# Altium PCB Tigershark 3D R2.3 - TR.PcbDoc (part 3 of 4)
Units mil, origin at the board's own origin, x right, y up, seen from the top; angles counter-clockwise.
Board outline 4100 x 4050 mil, 4 copper layers (Top Layer, Groun Plane, Power Plane, Bottom Layer), stack 61.73 mil thick; 367 components, 240 nets, 1160 pads, 805 vias.
Unrouted connection lines stored in the file: 6.
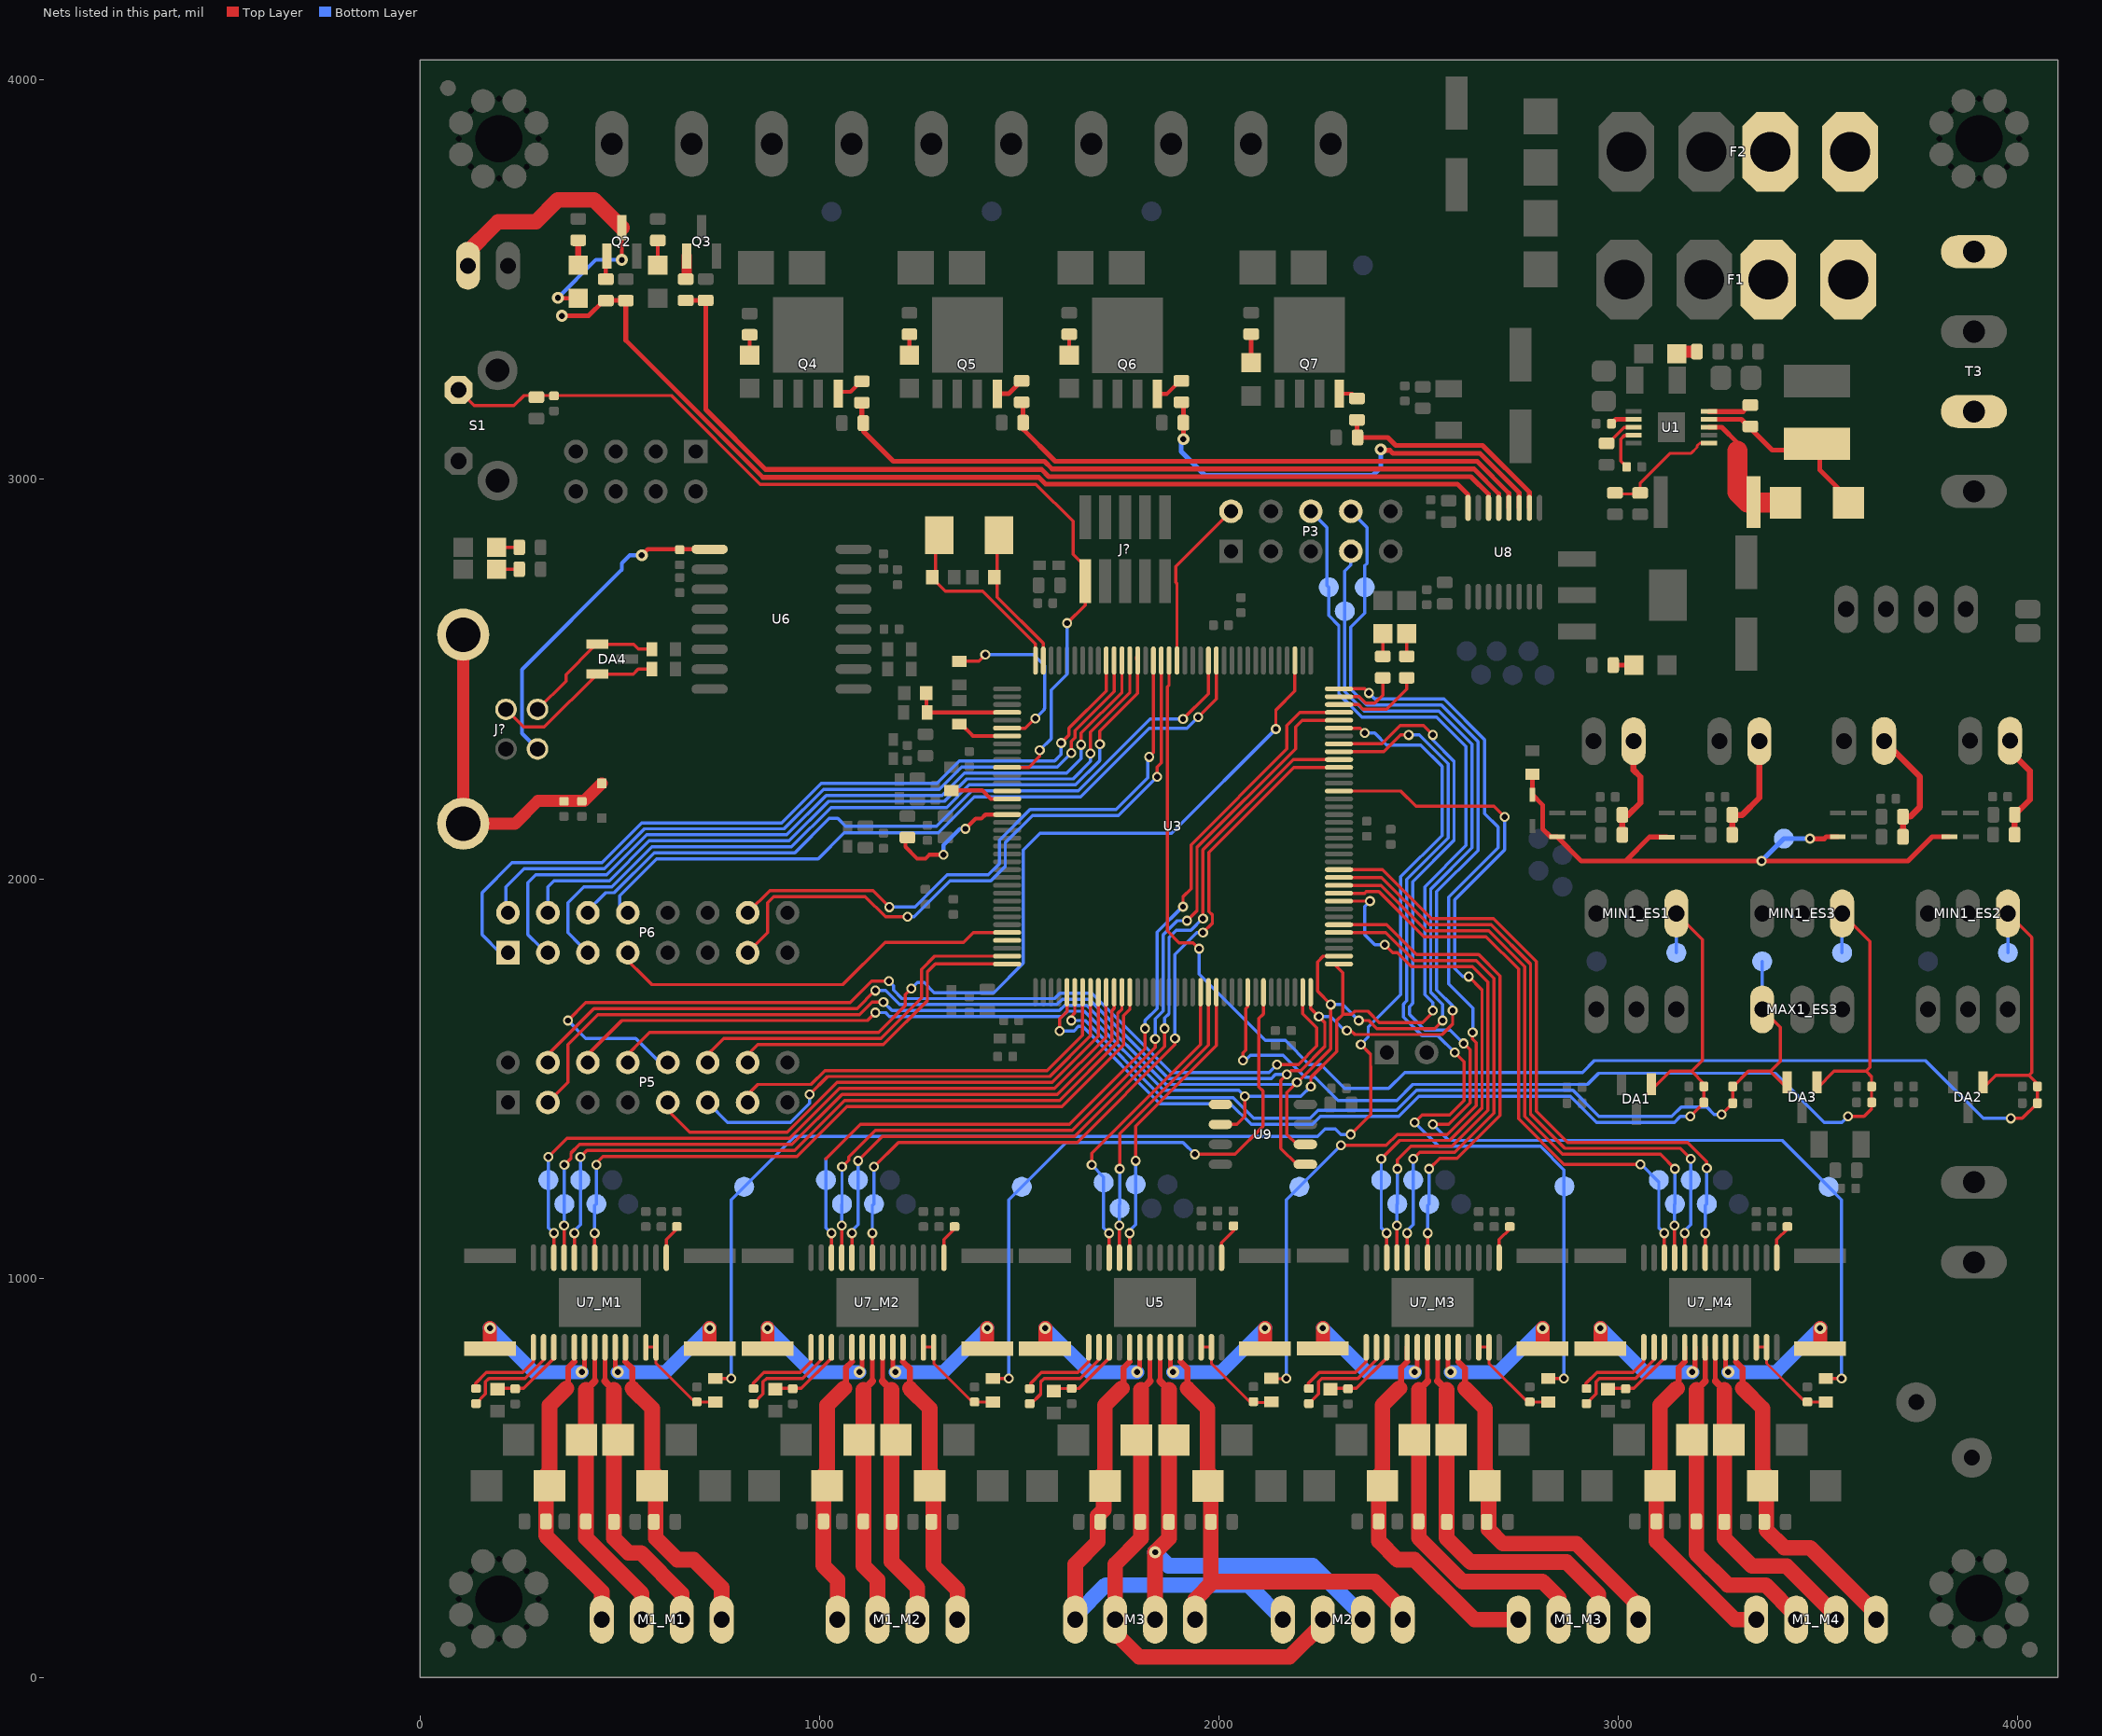
[diagram p5: the nets of this part, all layers, seen from the top]

## Via types
v1: diameter 30, hole 15, Top Layer to Bottom Layer, tented both sides, 465 vias
v2: diameter 25, hole 15, Top Layer to Bottom Layer, tented both sides, 192 vias
v3: diameter 19.68, hole 7.87, Top Layer to Bottom Layer, 75 vias
v4: diameter 25, hole 15, Top Layer to Bottom Layer, 61 vias
v5: diameter 30, hole 15, Top Layer to Bottom Layer, 9 vias
v6: diameter 45, hole 20, Top Layer to Bottom Layer, tented both sides, 2 vias
v7: diameter 25, hole 15, Top Layer to Bottom Layer, tented bottom, 1 vias

## Nets (pads, with @x,y where several pads share a name; then routed paths per layer and width w, separated by ;. In a path a pad name is that pad's centre, name@x,y a point inside that pad or via, vN(x,y) a via of type N, cw(c..) or ccw(c..) an arc to the next point about the centre after c; other vN are vias at no path point) (continued)
MAX_ES3: C2_ES3.2 DA3.2 MAX1_ES3.1 R3_ES3.1 TP10_ES3.1 U3.78 | length 2437.4
  Top Layer w8: v4(1630,1645) 1630,1655 1638.94,1663.94 U3.78@1638.94,1715.75 ; v2(3258.07,1410) R3_ES3.1@3286.1,1438.03 3286.1,1479.13 3325.43,1518.47 3380.43,1518.47 3405,1543.03 3405,1628.03 MAX1_ES3.1@3360,1673.03 ; C2_ES3.2@3284.95,1478.03 C2_ES3.2@3284.95,1479.45 ; 3380,1518.03 3422.6,1475.43 DA3.2@3420,1472.83
  Bottom Layer w8: v4(1630,1645) 1665.15,1645 1858.38,1451.77 2035,1451.77 2086.77,1400 2228.13,1400 2248.13,1420 2444.34,1420 2494.34,1470 2886.21,1470 2951.21,1405 3133.74,1405 3157.24,1428.5 3221.5,1428.5 3240,1410 v2(3258.07,1410) ; MAX1_ES3.1@3360,1673.03 TP10_ES3.1@3360,1793.03
MCCDZ: P5.14 U3.72 | length 813.8
  Top Layer w8: P5.14@800,1540 845,1585 1160,1585 1270,1695 1270,1766.77 1289.84,1786.61 U3.72@1469.65,1786.61
MCCK: P5.12 U3.71 | length 922
  Top Layer w8: P5.12@700,1540 760,1600 1153.79,1600 1255,1701.21 1255,1772.98 1288.32,1806.3 U3.71@1469.65,1806.3
MCDZ0: P5.10 U3.107 | length 2478
  Top Layer w8: v2(370,1645) 415,1690 1076.77,1690 1130.27,1743.5 v2(1173.5,1743.5) ; v2(2145,1535) 2198.79,1535 2245,1581.21 2245,1626.77 2209.8,1661.96 U3.107@2209.8,1715.75
  Bottom Layer w8: v2(370,1645) 415,1600 540,1600 P5.10@600,1540 ; v2(1173.5,1743.5) 1185,1732 1185,1721.21 1206.21,1700 1588.13,1700 1601.63,1713.5 1681.5,1713.5 1880,1515 2125,1515 v2(2145,1535)
MCDZ1: P5.9 U3.81 | length 1338.9
  Top Layer w8: P5.9@600,1440 675,1365 918.79,1365 1043.79,1490 1582.43,1490 1697.99,1605.57 U3.81@1697.99,1715.75
MCDZ2: P5.11 U3.80 | length 1190.7
  Top Layer w8: v2(975,1460) 1020,1505 1576.21,1505 1678.31,1607.09 U3.80@1678.31,1715.75
  Bottom Layer w8: P5.11@720,1440 770,1390 927.31,1390 975,1437.69 v2(975,1460)
MCDZ3: P5.13 U3.79 | length 1035.6
  Top Layer w8: P5.13@800,1440 845,1485 978.79,1485 1013.79,1520 1570,1520 1658.5,1608.5 1658.5,1715.63 U3.79@1658.62,1715.75
MIN_ES1: C1_ES1.2 DA1.1 MIN1_ES1.1 R2_ES1.1 TP9_ES1.1 U3.77 | length 2646.5
  Top Layer w8: v4(1600.76,1618.99) 1600.76,1648.99 1619.25,1667.49 U3.77@1619.25,1715.75 ; DA1.1@3075,1463.03 3130,1518.03 3183.03,1518.03 ; MIN1_ES1.1@3145,1913.03 3210,1848.03 3210,1545 3183.03,1518.03 ; v2(3180,1405) 3214,1439 C1_ES1.2@3214,1480 ; C1_ES1.2@3213.9,1487.17 3183.03,1518.03
  Bottom Layer w8: v4(1600.76,1618.99) 1637.22,1618.99 1648.23,1630 1658.93,1630 1852.17,1436.77 2028.79,1436.77 2080.55,1385 2234.34,1385 2254.34,1405 2450.55,1405 2500.55,1455 2880,1455 2945,1390 3139.95,1390 3154.95,1405 v2(3180,1405) ; TP9_ES1.1@3145,1815 MIN1_ES1.1@3145,1913.03
MIN_ES2: C1_ES2.2 DA2.1 MIN1_ES2.1 R2_ES2.1 TP9_ES2.1 U3.19 | length 3904.9
  Top Layer w8: U3.19@1875.16,2546.46 1875,2546.3 1875,2485 1870.47,2480.47 1870.47,1869.53 1900,1840 1935,1840 v2(1950,1825) ; DA2.1@3915,1472.83 3912.4,1475.43 3945,1508.03 4028.03,1508.03 ; MIN1_ES2.1@3975,1913.03 4035,1853.03 4035,1515 4028.03,1508.03 ; v2(3981.97,1400) 4010.87,1400 R2_ES2.1@4048.9,1438.03 4048.9,1487.17 4028.03,1508.03
  Bottom Layer w8: v2(1950,1825) 1950,1761.21 2116.21,1595 2166.21,1595 2226.21,1535 2255,1535 2315,1475 2425,1475 2465,1515 2910,1515 2939.69,1544.69 3768.34,1544.69 3913.03,1400 v2(3981.97,1400) ; TP9_ES2.1@3975,1815 MIN1_ES2.1@3975,1913.03
MIN_ES3: C1_ES3.2 DA3.1 MIN1_ES3.1 R2_ES3.1 TP9_ES3.1 U3.100 | length 2665.5
  Top Layer w8: v4(2060,1545) 2060,1564.08 2067.32,1571.4 2067.32,1675 2072.01,1679.68 U3.100@2072.01,1715.75 ; DA3.1@3497.4,1475.43 3540,1518.03 3620,1518.03 ; MIN1_ES3.1@3560,1913.03 3630,1843.03 3630,1527.94 3620.04,1517.99 3633.7,1504.33 3633.7,1478.03 R2_ES3.1@3633.7,1438.03 ; v2(3575,1405) 3615,1405 3633.7,1423.7 R2_ES3.1@3633.7,1440
  Bottom Layer w8: v4@2060,1540 2078.5,1558.5 2160.29,1558.5 2215.29,1503.5 2239.73,1503.5 2298.23,1445 2445,1445 2485,1485 2922.43,1485 2950.46,1513.03 3391.97,1513.03 3515,1390 3560,1390 v2(3575,1405) ; TP9_ES3.1@3560,1815 MIN1_ES3.1@3560,1913.03
MISO: P3.8 P5.4 TP7.1 U3.108 U9.5 | length 4582.2
  Top Layer w8: P5.4@300,1540 435,1675 1093.79,1675 1138.79,1720 v2(1140,1720) ; U9.5@2216.3,1285 2195,1285 2155,1325 2155,1495 v2(2170,1510) 2180,1520 2205,1520 2265,1580 2265,1640 v2(2250,1655) 2229.49,1675.51 U3.108@2229.49,1715.75 ; v2(2320,1620) 2330,1620 2340,1610 2558.79,1610 2585,1636.21 v2(2585,1670)
  Bottom Layer w8: v2(1140,1720) 1165,1720 1200,1685 1594.34,1685 1607.84,1698.5 1675.29,1698.5 1873.79,1500 2131.21,1500 2141.21,1510 v2(2170,1510) ; v2(2250,1655) 2280,1655 2315,1620 v2(2320,1620) ; P3.8@2330,2920 2370.53,2879.47 2370.53,2789.47 2365,2783.94 2365,2665 2330,2630 2330,2475 2370,2435 2556.87,2435 2648.5,2343.37 2648.5,2071.22 2545,1967.72 2545,1722.02 2585,1682.02 v2(2585,1670) v2@2590,1670
MOD0E1: TP37_M1.1 U3.84 U7_M1.24 | length 1851.5
  Top Layer w8: U7_M1.24@386.02,1052.2 v2(386.02,1112.64) ; v2(401.26,1303.74) 417.52,1320 937.43,1320 1062.43,1445 1601.07,1445 1746.5,1590.43 1746.5,1663.37 1757.05,1673.92 U3.84@1757.05,1715.75
  Bottom Layer w8: v2(386.02,1112.64) 386.02,1118.57 401.23,1133.77 TP37_M1.1@401.23,1245.77 v2@401.23,1303.71
MOD0E2: TP37_M2.1 U3.135 U7_M2.24 | length 2122.7
  Top Layer w8: U7_M2.24@1081.02,1052.2 v2(1081.02,1112.64) ; v2(1096.26,1293.74) 1157.52,1355 1638.35,1355 1863.5,1580.15 v2(1863.5,1625) ; v2(1960,1900) 1960,2072.57 2185.85,2298.43 U3.135@2300.35,2298.43
  Bottom Layer w8: v2(1081.02,1112.64) 1081.02,1118.57 1096.23,1133.77 TP37_M2.1@1096.23,1245.77 v2@1096.23,1293.71 ; v2(1863.5,1625) 1863.5,1651.07 1875,1662.57 1875,1853.79 1892.71,1871.5 1929.73,1871.5 1958.23,1900 v2(1960,1900)
MOD0E3: TP37_M3.1 U3.113 U7_M3.24 | length 1275.3
  Top Layer w8: U3.113@2300.35,1865.35 2417.88,1865.35 2488.23,1795 2644.08,1795 2688.5,1750.58 2688.5,1413.65 2589.85,1315 2502.52,1315 v4(2486.26,1298.74) ; U7_M3.24@2471.02,1052.2 v4(2471.02,1112.64)
  Bottom Layer w8: v4(2471.02,1112.64) 2471.02,1118.57 2486.23,1133.77 TP37_M3.1@2486.23,1245.77 v4@2486.23,1298.71
MOD0E4: TP37_M4.1 U3.120 U7_M4.24 | length 1645.2
  Top Layer w8: U3.120@2300.35,2003.15 2407.36,2003.15 2525.51,1885 2681.36,1885 2780,1786.36 2780,1411.36 2866.36,1325 3155,1325 v4(3181.23,1298.77) ; U7_M4.24@3166.02,1052.2 v4(3166.02,1112.64)
  Bottom Layer w8: v4(3166.02,1112.64) 3166.02,1118.57 3181.23,1133.77 TP37_M4.1@3181.23,1245.77 v4(3181.23,1298.77)
MOD0E_Z: TP19.1 U3.96 U5.24 | length 747.6
  Top Layer w8: U5.24@1776.06,1052.17 v4(1776.06,1112.61) ; v4(1791.26,1293.74) 1791.26,1380.19 1993.27,1582.2 U3.96@1993.27,1715.75
  Bottom Layer w8: v4@1776.06,1118.54 1791.26,1133.74 TP19.1@1791.26,1234.74 v4(1791.26,1293.74)
MOD1E1: TP36_M1.1 U3.83 U7_M1.25 | length 1861
  Top Layer w8: U7_M1.25@360.43,1052.2 v2(360.43,1132.05) ; v2(361.26,1283.74) 377.76,1300.24 377.76,1313.47 399.29,1335 931.21,1335 1056.21,1460 1594.85,1460 1731.5,1596.65 1731.5,1669.59 1737.36,1675.45 U3.83@1737.36,1715.75
  Bottom Layer w8: v2(360.43,1132.05) 360.43,1184.98 TP36_M1.1@361.23,1185.77 v2@361.23,1283.71
MOD1E2: TP36_M2.1 U3.140 U7_M2.25 | length 2217.4
  Top Layer w8: U7_M2.25@1055.43,1052.2 v2(1055.43,1132.05) ; v2(1056.26,1278.74) 1072.76,1295.24 1072.76,1303.47 1139.29,1370 1632.13,1370 1840,1577.87 v2(1840,1598.64) ; v2(1920,1895) 1945,1920 1945,2078.79 2191.5,2325.29 2191.5,2379.73 2208.62,2396.85 U3.140@2300.35,2396.85
  Bottom Layer w8: v2(1055.43,1132.05) 1055.43,1184.98 TP36_M2.1@1056.23,1185.77 1056.23,1233.74 v2(1056.26,1278.74) ; v2(1840,1598.64) 1840,1648.79 1860,1668.79 1860,1860 1895,1895 v2(1920,1895)
MOD1E3: TP36_M3.1 U3.117 U7_M3.25 | length 1361.4
  Top Layer w8: U3.117@2300.35,1944.09 v2(2378.11,1944.09) ; v2(2415,1835) 2435,1815 2447.02,1815 2482.02,1780 2635,1780 2673.5,1741.5 2673.5,1419.86 2583.64,1330 2480,1330 2446.26,1296.26 v4(2446.26,1273.74) ; U7_M3.25@2445.43,1052.2 v4(2445.43,1132.05)
  Bottom Layer w8: v2(2378.11,1944.09) 2365,1930.98 2365,1860 2390,1835 v2(2415,1835) ; v4(2445.43,1132.05) 2445.43,1184.98 TP36_M3.1@2446.23,1185.77 v4@2446.23,1265.77
MOD1E4: TP36_M4.1 U3.119 U7_M4.25 | length 1568.4
  Top Layer w8: U3.119@2300.35,1983.46 2405.84,1983.46 2519.3,1870 2675.15,1870 2765,1780.15 2765,1405.15 2860.15,1310 3105,1310 v4(3141.23,1273.77) ; U7_M4.25@3140.43,1052.2 v4(3140.43,1132.05)
  Bottom Layer w8: v4(3140.43,1132.05) 3140.43,1184.98 TP36_M4.1@3141.23,1185.77 v4@3141.23,1265.77
MOD1E_Z: TP18.1 U3.95 U5.25 | length 746.9
  Top Layer w8: U5.25@1750.46,1052.17 v4(1750.46,1132.02) ; v4(1751.26,1273.74) 1751.26,1361.41 1973.58,1583.73 U3.95@1973.58,1715.75
  Bottom Layer w8: v4(1750.46,1132.02) TP18.1@1750.46,1184.94 ; TP18.1@1751.26,1185.74 v4@1751.26,1265.74
MOD2E1: TP35_M1.1 U3.82 U7_M1.26 | length 1889.7
  Top Layer w8: v2(321.26,1303.74) 367.52,1350 925,1350 1050,1475 1588.64,1475 1716.5,1602.86 1716.5,1714.57 U3.82@1717.68,1715.75 ; U7_M1.26@334.84,1052.2 v2(334.84,1112.64)
  Bottom Layer w8: v2@321.23,1303.71 TP35_M1.1@321.23,1245.77 321.23,1126.25 v2(334.84,1112.64)
MOD2E2: TP35_M2.1 U3.141 U7_M2.26 | length 2266.5
  Top Layer w8: 1016.26,1298.74 1102.52,1385 1625.92,1385 1815,1574.08 v2(1815,1625) ; U7_M2.26@1029.84,1052.2 v2(1029.84,1112.64) ; v2(1910,1930) 1910,1955 1930,1975 1930,2085 2170,2325 2170,2384.07 2202.46,2416.54 U3.141@2300.35,2416.54
  Bottom Layer w8: 1016.23,1298.71 TP35_M2.1@1016.23,1245.77 1016.23,1126.25 v2(1029.84,1112.64) ; v2(1815,1625) 1815,1645 1845,1675 1845,1866.21 1908.79,1930 v2(1910,1930)
MOD2E3: TP35_M3.1 U3.131 U7_M3.26 | length 1816.5
  Top Layer w8: U3.131@2300.35,2219.68 2454.65,2219.68 2492.84,2181.5 2688.5,2181.5 v2(2715,2155) ; v4(2406.26,1298.74) 2452.52,1345 2577.43,1345 2658.5,1426.07 2658.5,1721.5 v2(2625,1755) ; U7_M3.26@2419.84,1052.2 v4(2419.84,1112.64)
  Bottom Layer w8: v4@2406.23,1298.71 TP35_M3.1@2406.23,1245.77 2406.23,1126.25 v4(2419.84,1112.64) ; v2(2625,1755) 2610,1755 2590,1775 2590,1947.57 2715,2072.57 v2(2715,2155)
MOD2E4: TP35_M4.1 U3.118 U7_M4.26 | length 1518.2
  Top Layer w8: U3.118@2300.35,1963.78 2364.56,1963.78 2368.38,1967.59 2400.49,1967.59 2513.09,1855 2668.93,1855 2750,1773.93 2750,1398.93 2863.93,1285 v4(3055,1285) ; U7_M4.26@3114.84,1052.2 v4(3114.84,1112.64)
  Bottom Layer w8: v4@3055,1287 3101.23,1240.77 3101.23,1126.25 v4(3114.84,1112.64)
MOD2E_Z: TP17.1 U3.94 U5.26 | length 794.6
  Top Layer w8: v4(1681.26,1283.74) 1681.26,1312.62 1953.9,1585.26 U3.94@1953.9,1715.75 ; U5.26@1724.87,1052.17 v4(1724.87,1112.61)
  Bottom Layer w8: v4(1681.26,1283.74) 1711.26,1253.74 1711.26,1126.22 v4(1724.87,1112.61)
MODE0_EXP1: P6.1 U3.27 | length 2044
  Top Layer w8: v2(1605,2340) 1624.85,2359.85 1624.85,2377.28 1717.68,2470.1 U3.27@1717.68,2546.46
  Bottom Layer w8: P6.1@200,1815 155,1860 155,1965 230,2040 455.15,2040 555.15,2140 905.15,2140 1004.15,2239 1294,2239 1350,2295 1588.79,2295 1605,2311.21 v2(1605,2340)
MODE0_EXP2: P6.2 U3.26 | length 1900.9
  Top Layer w8: v2(1630,2315) 1630,2343.79 1639.85,2353.64 1639.85,2371.06 1737.36,2468.58 U3.26@1737.36,2546.46
  Bottom Layer w8: P6.2@200,1915 215,1930 215,1980 260,2025 461.36,2025 561.36,2125 911.36,2125 1010.36,2224 1300.21,2224 1356.21,2280 1595,2280 v2(1630,2315)
MODE1_EXP1: P6.3 U3.25 | length 1988.8
  Top Layer w8: v2(1654.85,2335.4) 1654.85,2364.85 1757.05,2467.05 U3.25@1757.05,2546.46
  Bottom Layer w8: P6.3@300,1815 300,1830 270,1860 270,1990 290,2010 467.57,2010 567.57,2110 917.57,2110 1016.57,2209 1306.43,2209 1362.43,2265 1618.79,2265 1654.85,2301.06 v2(1654.85,2335.4)
MODE1_EXP2: P6.4 U3.24 | length 1855.3
  Top Layer w8: v2(1678.35,2313.35) 1678.35,2367.14 1776.73,2465.52 U3.24@1776.73,2546.46
  Bottom Layer w8: P6.4@300,1915 320,1935 320,1980 335,1995 473.79,1995 573.79,2095 923.79,2095 1022.79,2194 1312.64,2194 1368.64,2250 1635,2250 1678.35,2293.35 v2(1678.35,2313.35)
MODE2_EXP1: P6.5 U3.23 | length 1916.3
  Top Layer w8: v2(1701.85,2336.85) 1701.85,2369.42 1796.42,2463.99 U3.23@1796.42,2546.46 1793.64,2549.24 U3.23@1793.64,2555
  Bottom Layer w8: P6.5@400,1815 400,1835 370,1865 370,1940 410,1980 480,1980 580,2080 930,2080 1028.5,2178.5 1318.35,2178.5 1374.85,2235 1641.21,2235 1701.85,2295.64 v2(1701.85,2336.85)
MODE2_EXP2: P6.6 U3.14 | length 1899.8
  Top Layer w8: v2(1910,2400) 1973.58,2463.58 U3.14@1973.58,2546.46
  Bottom Layer w8: P6.6@400,1915 415,1915 465,1965 486.21,1965 586.21,2065 938.23,2065 1024.23,2151 1045.77,2151 1065.27,2131.5 1292.57,2131.5 1381.07,2220 1647.43,2220 1827.43,2400 v2(1910,2400)
MOSI: P3.6 P5.6 TP8.1 U3.109 U9.2 | length 4290.6
  Top Layer w8: P5.6@400,1540 505,1645 1120,1645 v2(1140,1665) ; U9.2@2003.7,1385 2045,1385 2065,1405 v2(2065,1455) ; v2(2230,1480) 2230,1502.57 2295,1567.57 2295,1645 2310.81,1660.81 ; U3.109@2290,1785 2310,1765 2310,1660.81 2332.57,1660.81 2340.27,1668.5 2372.71,1668.5 2401.21,1640 2510,1640 2540,1670 v2(2535,1670)
  Bottom Layer w8: v2(1140,1665) 1165,1665 1175,1655 1606.77,1655 1620.27,1668.5 1662.86,1668.5 1861.36,1470 2050,1470 v2(2065,1455) 2205,1455 v2(2230,1480) ; P3.6@2230,2920 2270.53,2879.47 2270.53,2734.47 TP8.1@2275,2730 2275,2659.09 2300,2634.09 2300,2462.57 2357.57,2405 2544.45,2405 2618.5,2330.95 2618.5,2083.65 2515,1980.15 2515,1709.59 2535,1689.59 v2(2535,1670)
NetC3_M1_1: C3_M1.1 D20_M1.A M1_M1.4 U7_M1.5 | length 770.2
  Top Layer w12: 386.02,791.02 U7_M1.5@386.02,827.8
  Top Layer w15: 367,724.48 370.76,728.24 370.76,775.76 386.02,791.02
  Top Layer w39: 367,724.48 324,681.48 324,515 315,506 315,355 455,215 M1_M1.4@455,145
NetC3_M2_1: C3_M2.1 D20_M2.A M1_M2.4 U7_M2.5 | length 726.8
  Top Layer w12: 1081.02,791.02 U7_M2.5@1081.02,827.8
  Top Layer w15: 1062,724.48 1065.76,728.24 1065.76,775.76 1081.02,791.02
  Top Layer w39: C3_M2.1@1009.77,391 1009.77,280.23 1045,245 M1_M2.4@1045,145 ; C3_M2.1@1010,391 1010,506 1019,515 1019,681.48 1062,724.48
NetC3_M3_1: C3_M3.1 D20_M3.A M1_M3.4 U7_M3.5 | length 947.2
  Top Layer w12: 2471.02,791.02 U7_M3.5@2471.02,827.8
  Top Layer w15: 2452,724.48 2455.76,728.24 2455.76,775.76 2471.02,791.02
  Top Layer w39: 2452,724.48 2409,681.48 2409,515 2400,506 2400,341.31 2446.31,295 2489.69,295 2639.69,145 M1_M3.4@2750,145
NetC3_M4_1: C3_M4.1 D20_M4.A M1_M4.4 U7_M4.5 | length 847.2
  Top Layer w12: 3166.02,791.02 U7_M4.5@3166.02,827.8
  Top Layer w15: 3147,724.48 3150.76,728.24 3150.76,775.76 3166.02,791.02
  Top Layer w39: 3147,724.48 3104,681.48 3104,515 3095,506 3095,341.31 3291.31,145 M1_M4.4@3345,145
NetC5_M1_1: C5_M1.1 D21_M1.A M1_M1.3 U7_M1.7 | length 750
  Top Layer w12: 437.2,742.2 U7_M1.7@437.2,827.8
  Top Layer w18: 415,720 437.2,742.2
  Top Layer w39: 415,720 415,350 555,210 M1_M1.3@555,145
NetC5_M2_1: C5_M2.1 D21_M2.A M1_M2.3 U7_M2.7 | length 706.5
  Top Layer w12: 1132.2,742.2 U7_M2.7@1132.2,827.8
  Top Layer w18: 1110,720 1132.2,742.2
  Top Layer w39: 1110,720 1110,280 1145,245 M1_M2.3@1145,145
NetC5_M3_1: C5_M3.1 D21_M3.A M1_M3.3 U7_M3.7 | length 954.1
  Top Layer w12: 2522.2,742.2 U7_M3.7@2522.2,827.8
  Top Layer w18: 2500,720 2522.2,742.2
  Top Layer w39: 2500,720 2500,350 2610,240 2810,240 2850,200 M1_M3.3@2850,145
NetC5_M4_1: C5_M4.1 D21_M4.A M1_M4.3 U7_M4.7 | length 851.1
  Top Layer w12: 3217.2,742.2 U7_M4.7@3217.2,827.8
  Top Layer w18: 3195,720 3217.2,742.2
  Top Layer w39: 3195,720 3195,310 3273.5,231.5 3368.4,231.5 3445,154.9 M1_M4.3@3445,145
NetC6_M1_1: C6_M1.1 D22_M1.A M1_M1.1 U7_M1.10 | length 806.8
  Top Layer w12: 513.98,791.02 U7_M1.10@513.98,827.8
  Top Layer w15: 513.98,791.02 531,774 531,724
  Top Layer w39: 531,724 581,674 581,515 590,506 590,348.74 643.74,295 685,295 755,225 M1_M1.1@755,145
NetC6_M2_1: C6_M2.1 D22_M2.A M1_M2.1 U7_M2.10 | length 739.1
  Top Layer w12: 1208.98,791.02 U7_M2.10@1208.98,827.8
  Top Layer w15: 1208.98,791.02 1226,774 1226,724
  Top Layer w39: 1226,724 1276,674 1276,515 1285,506 1285,280 1345,220 M1_M2.1@1345,145
NetC6_M3_1: C6_M3.1 D22_M3.A M1_M3.1 U7_M3.10 | length 977.7
  Top Layer w12: 2598.98,791.02 U7_M3.10@2598.98,827.8
  Top Layer w15: 2598.98,791.02 2616,774 2616,724
  Top Layer w39: 2616,724 2666,674 2666,515 2675,506 2675,370.46 2710.46,335 2895,335 3050,180 M1_M3.1@3050,145
NetC6_M4_1: C6_M4.1 D22_M4.A M1_M4.1 U7_M4.10 | length 866.3
  Top Layer w12: 3293.98,791.02 U7_M4.10@3293.98,827.8
  Top Layer w15: 3293.98,791.02 3311,774 3311,724
  Top Layer w39: 3311,724 3361,674 3361,515 3370,506 3370,370 3415,325 3480,325 3645,160 M1_M4.1@3645,145
NetC8_M1_1: C8_M1.1 D23_M1.A M1_M1.2 U7_M1.8 | length 780.7
  Top Layer w12: 462.8,742.2 U7_M1.8@462.8,827.8
  Top Layer w18: 462.8,742.2 485,720
  Top Layer w39: 485,720 485,348.82 521.58,312.24 552.76,312.24 655,210 M1_M1.2@655,145
NetC8_M2_1: C8_M2.1 D23_M2.A M1_M2.2 U7_M2.8 | length 718.9
  Top Layer w12: 1157.8,742.2 U7_M2.8@1157.8,827.8
  Top Layer w18: 1157.8,742.2 1180,720
  Top Layer w39: 1180,720 1180,290 1245,225 M1_M2.2@1245,145
NetC8_M3_1: C8_M3.1 D23_M3.A M1_M3.2 U7_M3.8 | length 990.1
  Top Layer w12: 2547.8,742.2 U7_M3.8@2547.8,827.8
  Top Layer w18: 2547.8,742.2 2570,720
  Top Layer w39: 2570,720 2570,350.05 2571,349.05 2571,347.82 2629.82,289 2870,289 2950,209 M1_M3.2@2950,145
NetC8_M4_1: C8_M4.1 D23_M4.A M1_M4.2 U7_M4.8 | length 858.5
  Top Layer w12: 3242.8,742.2 U7_M4.8@3242.8,827.8
  Top Layer w18: 3242.8,742.2 3265,720
  Top Layer w39: 3265,720 3265,348.82 3334.82,279 3421,279 3545,155 M1_M4.2@3545,145
NetC22_1: C22.1 U1.4 | length 112
  Top Layer w8: C22.1@3020.3,3031 3005.52,3045.78 3005.52,3100.29 3015.97,3110.74 U1.4@3037.83,3110.74
NetC24_2: C24.2 D8.A J?.5@108,2611.16 J?.6@108,2137.94 R24.2 | length 862.1
  Top Layer w30: J?.5@108,2611.16 J?.6@108,2137.94 237.94,2137.94 295,2195 411,2195 D8.A@455,2239
NetC35_2: C35.2 R36.1 U5.3 | length 201.8
  Top Layer w8: C35.2@1583.77,721.27 1586.21,723.71 1649.07,723.71 1724.87,799.51 U5.3@1724.87,827.76
NetC40_1: C40.1 U1.10 | length 93.4
  Top Layer w12: U1.10@3226.8,3169.8 3311.8,3169.8 C40.1@3317.77,3175.77
NetC40_2: C40.2 D2.C L1.1 U1.9 | length 475.6
  Top Layer w12: U1.9@3226.8,3150.11 3308.12,3150.11 3336,3122.23 3384.97,3073.26 3504,3073.26 3504,3023.74 D2.C@3586.74,2941
NetC43_2: C43.2 U3.36 X2.1 | length 476.4
  Top Layer w8: X2.1@1300,2860 1290,2850 1290,2745 1315,2720 1408.79,2720 1540.51,2588.27 U3.36@1540.51,2546.46
NetC44_2: C44.2 U3.35 X2.2 | length 376.3
  Top Layer w8: X2.2@1445,2875 1445,2705 1560.2,2589.8 U3.35@1560.2,2546.46
NetC49_1: C49.1 U5.1 | length 218.5
  Top Layer w8: C49.1@1528.77,722.41 1528.77,736.5 1555.98,763.71 1646.65,763.71 1673.69,790.75 U5.1@1673.69,827.76
NetC49_2: C49.2 U5.2 | length 266.8
  Top Layer w8: C49.2@1528.77,684.71 1553.77,709.71 1553.77,740.29 1562.19,748.71 1652.86,748.71 1699.28,795.13 U5.2@1699.28,827.76
NetC50_2: C50.2 U5.15 | length 91.1
  Top Layer w8: U5.15@2006.6,1051.94 2006.6,1089.08 2036.26,1118.74 C50.2@2036.26,1130.74
NetC51_2: C51.2 R37.1 U5.12 U5.13 | length 255
  Top Layer w7: U5.12@1955.19,827.76 1980.78,827.76 1980.78,786.7 2078.3,689.18 R37.1@2128.77,689.18
NetC52_1: C52.1 D25.A M2.4 M3.4 U5.5 | length 1323.8
  Top Layer w12: 1776.06,790.99 U5.5@1776.06,827.76
  Top Layer w15: 1760.79,728.21 1760.79,775.73 1776.06,790.99
  Top Layer w39: M3.4@1640,145 1640,283.79 1696.26,340.05 1696.26,404.83 1711.26,419.83 1711.26,499.74 D25.A@1705.03,505.97 ; D25.A@1714.03,514.97 1714.03,681.45 1757.03,724.45
  Bottom Layer w39: M3.4@1640,145 1640,155 1716.5,231.5 2073.5,231.5 M2.4@2160,145
NetC58_1: C58.1 J?.1@294,2324.94 U6.1 | length 819.1
  Top Layer w10: v1(555,2810) 570,2825 U6.1@724.88,2825
  Bottom Layer w10: J?.1@294,2324.94 255,2363.94 255,2524 505,2774 505,2790 525,2810 v1(555,2810)
NetC62_1: C62.1 D26.A M2.3 M3.3 U5.7 | length 1298.4
  Top Layer w12: 1827.24,742.17 U5.7@1827.24,827.76
  Top Layer w18: 1805.03,719.97 1827.24,742.17
  Top Layer w39: M3.3@1740,111.5 1800,51.5 2176.4,51.5 M2.3@2260,135.1 ; M3.3@1740,145 1740,283.76 1805.03,348.79 1805.03,719.97
NetC66_M1_2: C66_M1.2 R30_M1.1 U7_M1.3 | length 201.8
  Top Layer w8: C66_M1.2@193.74,721.3 196.18,723.74 259.04,723.74 334.84,799.54 U7_M1.3@334.84,827.8
NetC66_M2_2: C66_M2.2 R30_M2.1 U7_M2.3 | length 201.8
  Top Layer w8: C66_M2.2@888.74,721.3 891.18,723.74 954.04,723.74 1029.84,799.54 U7_M2.3@1029.84,827.8
NetC66_M3_2: C66_M3.2 R30_M3.1 U7_M3.3 | length 201.8
  Top Layer w8: C66_M3.2@2278.74,721.3 2281.18,723.74 2344.04,723.74 2419.84,799.54 U7_M3.3@2419.84,827.8
NetC66_M4_2: C66_M4.2 R30_M4.1 U7_M4.3 | length 201.8
  Top Layer w8: C66_M4.2@2973.74,721.3 2976.18,723.74 3039.04,723.74 3114.84,799.54 U7_M4.3@3114.84,827.8
NetC67_1: C67.1 D27.A M2.1 M3.1 U5.10 | length 1267.1
  Top Layer w12: 1904.01,790.99 U5.10@1904.01,827.76
  Top Layer w15: 1904.01,790.99 1921.03,773.97 1921.03,723.97
  Top Layer w39: 1921.03,723.97 1971.03,673.97 1971.03,514.97 1980.03,505.97 1979.49,505.42 C67.1@1979.49,389.74 1979.49,235 ; M3.1@1940,145 1940,195 1985,240 2390,240 2460,170 M2.1@2460,145
NetC68_M1_1: C68_M1.1 U7_M1.1 | length 218.5
  Top Layer w8: C68_M1.1@138.74,722.44 138.74,736.53 165.95,763.74 256.62,763.74 283.66,790.79 U7_M1.1@283.66,827.8
NetC68_M1_2: C68_M1.2 U7_M1.2 | length 266.8
  Top Layer w8: C68_M1.2@138.74,684.74 163.74,709.74 163.74,740.32 172.16,748.74 262.83,748.74 309.25,795.16 U7_M1.2@309.25,827.8
NetC68_M2_1: C68_M2.1 U7_M2.1 | length 218.5
  Top Layer w8: C68_M2.1@833.74,722.44 833.74,736.53 860.95,763.74 951.62,763.74 978.66,790.79 U7_M2.1@978.66,827.8
NetC68_M2_2: C68_M2.2 U7_M2.2 | length 266.8
  Top Layer w8: C68_M2.2@833.74,684.74 858.74,709.74 858.74,740.32 867.16,748.74 957.83,748.74 1004.25,795.16 U7_M2.2@1004.25,827.8
NetC68_M3_1: C68_M3.1 U7_M3.1 | length 218.5
  Top Layer w8: C68_M3.1@2223.74,722.44 2223.74,736.53 2250.95,763.74 2341.62,763.74 2368.66,790.79 U7_M3.1@2368.66,827.8
NetC68_M3_2: C68_M3.2 U7_M3.2 | length 266.8
  Top Layer w8: C68_M3.2@2223.74,684.74 2248.74,709.74 2248.74,740.32 2257.16,748.74 2347.83,748.74 2394.25,795.16 U7_M3.2@2394.25,827.8
NetC68_M4_1: C68_M4.1 U7_M4.1 | length 218.5
  Top Layer w8: C68_M4.1@2918.74,722.44 2918.74,736.53 2945.95,763.74 3036.62,763.74 3063.66,790.79 U7_M4.1@3063.66,827.8
NetC68_M4_2: C68_M4.2 U7_M4.2 | length 266.8
  Top Layer w8: C68_M4.2@2918.74,684.74 2943.74,709.74 2943.74,740.32 2952.16,748.74 3042.83,748.74 3089.25,795.16 U7_M4.2@3089.25,827.8
NetC71_M1_2: C71_M1.2 U7_M1.15 | length 88.9
  Top Layer w8: U7_M1.15@616.34,1052.2 616.34,1096.34 643.74,1123.74 C71_M1.2@643.74,1129.74
NetC71_M2_2: C71_M2.2 U7_M2.15 | length 88.9
  Top Layer w8: U7_M2.15@1311.34,1052.2 1311.34,1096.34 1338.74,1123.74 C71_M2.2@1338.74,1129.74
NetC71_M3_2: C71_M3.2 U7_M3.15 | length 88.9
  Top Layer w8: U7_M3.15@2701.34,1052.2 2701.34,1096.34 2728.74,1123.74 C71_M3.2@2728.74,1129.74
NetC71_M4_2: C71_M4.2 U7_M4.15 | length 88.9
  Top Layer w8: U7_M4.15@3396.34,1052.2 3396.34,1096.34 3423.74,1123.74 C71_M4.2@3423.74,1129.74
NetC72_1: C72.1 D28.A M2.2 M3.2 U5.8 | length 1302.2
  Top Layer w12: 1852.83,742.17 U5.8@1852.83,827.76
  Top Layer w18: 1852.83,742.17 1875.03,719.97
  Top Layer w39: M3.2@1840,145 v1(1840,313.76) 1875.03,348.79 1875.03,719.97
  Bottom Layer w39: v1(1840,313.76) 1873.76,280 2234.9,280 2360,154.9 M2.2@2360,145
NetC73_2: C73.2 R23.2 U3.40 | length 240.6
  Top Layer w10: C73.2@1267.56,2465 1267.56,2418.5 R23.2@1269.53,2416.54 ; R23.2@1278.35,2416.54 U3.40@1469.65,2416.54
NetC75_M1_2: C75_M1.2 R31_M1.1 U7_M1.12 U7_M1.13 | length 255
  Top Layer w7: U7_M1.12@565.16,827.8 590.75,827.8 590.75,786.73 688.27,689.21 R31_M1.1@738.74,689.21
NetC75_M2_2: C75_M2.2 R31_M2.1 U7_M2.12 U7_M2.13 | length 255
  Top Layer w7: U7_M2.12@1260.16,827.8 1285.75,827.8 1285.75,786.73 1383.27,689.21 R31_M2.1@1433.74,689.21
NetC75_M3_2: C75_M3.2 R31_M3.1 U7_M3.12 U7_M3.13 | length 255
  Top Layer w7: U7_M3.12@2650.16,827.8 2675.75,827.8 2675.75,786.73 2773.27,689.21 R31_M3.1@2823.74,689.21
NetC75_M4_2: C75_M4.2 R31_M4.1 U7_M4.12 U7_M4.13 | length 255
  Top Layer w7: U7_M4.12@3345.16,827.8 3370.75,827.8 3370.75,786.73 3468.27,689.21 R31_M4.1@3518.74,689.21
NetD2_A: D2.A R9.2 U1.8 | length 326.9
  Top Layer w12: U1.8@3226.8,3130.43 3258.67,3130.43 3297.88,3091.22 3297.88,3072
  Top Layer w50: 3297.88,3072 3297.88,2967.26 R9.2@3323.14,2942 ; R9.2@3338.14,2942 D2.A@3418,2942
NetD7_A: D7.A R8.1 | length 51.9
  Top Layer w30: D7.A@3144.34,3320 R8.1@3196.23,3320
NetD9_A: D9.A R11.1 | length 51.9
  Top Layer w12: R11.1@2986.77,2535 D9.A@3038.66,2535
NetD10_A: D10.A R13.1 | length 61.9
  Top Layer w15: D10.A@396,3536.91 R13.1@396,3598.8
NetD10_C: D10.C FAN-1.2 Q2.3 | length 848.3
  Top Layer w10: v1(345,3454.57) 346,3453.57 D10.C@396,3453.57 ; v1(505,3549.57) Q2.3@505,3630.22
  Top Layer w39: FAN-1.2@110,3525 110,3560 195,3645 290,3645 345,3700 435.22,3700 Q2.3@505,3630.22
  Bottom Layer w10: v1(345,3454.57) 440,3549.57 v1(505,3549.57)
NetD11_A: D11.A R47.1 | length 66.1
  Top Layer w10: D11.A@595,3536.34 R47.1@595,3598.23 ; D11.A@601,3523.34 D11.A@604,3520.34
NetD13_A: D13.A R56.1 | length 50.5
  Top Layer w10: D13.A@825,3311.34 R56.1@825,3361.87
NetD14_A: D14.A R60.1 | length 51.9
  Top Layer w10: D14.A@1225,3311.34 R60.1@1225,3363.23
NetD16_A: D16.A R64.1 | length 51.9
  Top Layer w10: D16.A@1625,3311.34 R64.1@1625,3363.23
NetD18_A: D18.A R68.1 | length 52
  Top Layer w12: D18.A@2080.5,3295.53 2080.5,3347.5
NetD24_A: D24.A R25.2 | length 56.9
  Top Layer w8: D24.A@191.34,2830 R25.2@248.23,2830
NetD29_A: D29.A R26.2 | length 56.9
  Top Layer w8: D29.A@191.34,2775 R26.2@248.23,2775
NetD30_A: D30.A R27.2 | length 56.9
  Top Layer w8: R27.2@2470,2556.77 D30.A@2470,2613.66
NetD31_A: D31.A R28.2 | length 56.9
  Top Layer w8: R28.2@2410,2556.77 D31.A@2410,2613.66
NetF1_1: F1.1 T3.3
NetF2_1: F2.1 T3.1
NetP2_TR1_1: P2_TR1.1 R14_TR1.1 R19_TR1.1 | length 277.6
  Top Layer w15: R14_TR1.1@3284.72,2110 R19_TR1.1@3284.72,2160 3310,2160 3352.95,2202.95 P2_TR1.1@3352.95,2344.53
NetP2_TR2_1: P2_TR2.1 R14_TR2.1 R19_TR2.1 | length 269.3
  Top Layer w15: R14_TR2.1@3009.72,2110 R19_TR2.1@3009.72,2160 3025,2160 3055,2190 3055,2255 3037.95,2272.05 P2_TR2.1@3037.95,2344.53
NetP2_TR3_1: P2_TR3.1 R14_TR3.1 R19_TR3.1 | length 271.2
  Top Layer w15: P2_TR3.1@3980.47,2345.47 3980.47,2319.53 4030,2270 4030,2198.23 R19_TR3.1@3992.24,2160.47 ; R14_TR3.1@3991.77,2110.47 R19_TR3.1@3991.77,2160.47
NetP2_TR4_1: P2_TR4.1 R14_TR4.1 R19_TR4.1 | length 311.2
  Top Layer w8: R19_TR4.1@3712.24,2155.47 R19_TR4.1@3716.47,2159.7
  Top Layer w15: P2_TR4.1@3665,2345 3755,2255 3755,2180 3730.47,2155.47 R19_TR4.1@3712.24,2155.47 ; R14_TR4.1@3712.24,2105 R19_TR4.1@3712.24,2155
NetQ2_1: Q2.1 R45.2 | length 68.9
  Top Layer w10: R45.2@465,3501.34 465,3566.53 Q2.1@467.6,3569.13
NetQ3_1: Q3.1 R52.2 | length 58.9
  Top Layer w25: R52.2@665,3501.77 667.6,3504.38 Q3.1@667.6,3559.57
NetQ4_4: Q4.4 R58.2 | length 73.2
  Top Layer w10: Q4.4@1046.5,3214.66 1051.36,3219.53 1077.75,3219.53 R58.2@1106,3247.77
NetQ5_4: Q5.4 R62.2 | length 74.5
  Top Layer w12: Q5.4@1445,3214.28 1473.5,3214.28 R62.2@1506,3246.77
NetQ6_4: Q6.4 R66.2 | length 72.4
  Top Layer w10: Q6.4@1846,3213.85 1868.85,3213.85 R66.2@1903.89,3248.89
NetQ7_4: Q7.4 R70.2 | length 49
  Top Layer w10: Q7.4@2301.5,3214.66 2333.41,3214.66 R70.2@2345.49,3202.58
NetR4_1: R4.1 U3.51 | length 158.6
  Top Layer w10: R4.1@1320,2221.57 1407.47,2221.57 1429.04,2200 U3.51@1469.65,2200
NetR5_2: R5.2 U3.42 | length 454.8
  Top Layer w8: R5.2@1350,2545.16 1399.06,2545.16 v2(1415,2561.1) ; U3.42@1469.65,2377.17 1514.29,2377.17 v2@1540,2402.87
  Bottom Layer w8: v2(1415,2561.1) 1536.1,2561.1 1563.5,2533.7 1563.5,2426.37 1562.5,2425.37 1562.5,2423.6 v2(1540,2401.1)
NetR6_1: R6.1 U3.53 | length 352.5
  Top Layer w10: R6.1@1215,2093.23 1215,2080 1244.5,2050.5 1265.15,2050.5 1274.65,2060 v2(1310,2060) ; v2@1360,2120 1370,2120 1370,2129.65 1390.85,2150.5 1405.15,2150.5 1415.28,2160.63 U3.53@1469.65,2160.63
  Bottom Layer w10: v2(1310,2060) 1310,2084 1310.12,2084 1351.12,2125 v2(1365,2125)
NetR7_1: R7.1 U1.3 | length 76.4
  Top Layer w8: R7.1@2974.84,3098.14 2982.14,3098.14 3014.43,3130.43 U1.3@3037.83,3130.43
NetR10_2: R10.2 R12.1 U1.6 | length 291.8
  Top Layer w7: R12.1@2990.36,2963.6 R10.2@3046.45,2963.6 ; R10.2@3054,2971.15 3054,2990 3129.56,3065.56 3182.25,3065.56 3197.18,3080.49 3197.18,3084.18 3204.06,3091.06 U1.6@3226.8,3091.06
NetR17_1: R17.1 U1.2 | length 56.9
  Top Layer w12: R17.1@2984.68,3141.05 2993.73,3150.11 U1.2@3037.83,3150.11
NetR22_2: R22.2 U3.43 | length 129.5
  Top Layer w10: R22.2@1353.05,2388.52 1384.09,2357.48 U3.43@1469.65,2357.48
NetR32_M1_2: R32_M1.2 U7_M1.9 | length 392.5
  Top Layer w12: U7_M1.9@488.39,827.8 488.39,771.61 v1(495,765)
  Top Layer w35: R32_M1.2@725,823.6 v1(725,875)
  Bottom Layer w35: v1(495,765) 615,765 v1(725,875)
NetR32_M2_2: R32_M2.2 U7_M2.9 | length 392.5
  Top Layer w12: U7_M2.9@1183.39,827.8 1183.39,771.61 v1(1190,765)
  Top Layer w35: R32_M2.2@1420,823.6 v1(1420,875)
  Bottom Layer w35: v1(1190,765) 1310,765 v1(1420,875)
NetR32_M3_2: R32_M3.2 U7_M3.9 | length 392.5
  Top Layer w12: U7_M3.9@2573.39,827.8 2573.39,771.61 v1(2580,765)
  Top Layer w35: R32_M3.2@2810,823.6 v1(2810,875)
  Bottom Layer w35: v1(2580,765) 2700,765 v1(2810,875)
NetR32_M4_2: R32_M4.2 U7_M4.9 | length 392.5
  Top Layer w12: U7_M4.9@3268.39,827.8 3268.39,771.61 v1(3275,765)
  Top Layer w35: R32_M4.2@3505,823.6 v1(3505,875)
  Bottom Layer w35: v1(3275,765) 3395,765 v1(3505,875)
NetR33_M1_2: R33_M1.2 U7_M1.6 | length 392.5
  Top Layer w12: v1(405,765) 411.61,771.61 U7_M1.6@411.61,827.8
  Top Layer w35: R33_M1.2@175,823.6 v1(175,875)
  Bottom Layer w35: v1(175,875) 285,765 v1(405,765)
NetR33_M2_2: R33_M2.2 U7_M2.6 | length 392.5
  Top Layer w12: v1(1100,765) 1106.61,771.61 U7_M2.6@1106.61,827.8
  Top Layer w35: R33_M2.2@870,823.6 v1(870,875)
  Bottom Layer w35: v1(870,875) 980,765 v1(1100,765)
NetR33_M3_2: R33_M3.2 U7_M3.6 | length 392.2
  Top Layer w12: v1(2490,765) 2496.61,771.61 U7_M3.6@2496.61,827.8
  Top Layer w35: R33_M3.2@2260,823.86 v1(2260,875)
  Bottom Layer w35: v1(2260,875) 2370,765 v1(2490,765)
NetR33_M4_2: R33_M4.2 U7_M4.6 | length 392.5
  Top Layer w12: v1(3185,765) 3191.61,771.61 U7_M4.6@3191.61,827.8
  Top Layer w35: R33_M4.2@2955,823.6 v1(2955,875)
  Bottom Layer w35: v1(2955,875) 3065,765 v1(3185,765)
NetR38_2: R38.2 U5.9 | length 392.5
  Top Layer w12: U5.9@1878.42,827.76 1878.42,771.58 v1(1885.03,764.97)
  Top Layer w35: R38.2@2115.03,823.6 v1(2115.03,874.97)
  Bottom Layer w35: v1(1885.03,764.97) 2005.03,764.97 v1(2115.03,874.97)
NetR39_2: R39.2 U5.6 | length 392.5
  Top Layer w12: v1(1795.03,764.97) 1801.65,771.58 U5.6@1801.65,827.76
  Top Layer w35: R39.2@1565.03,823.6 v1(1565.03,874.97)
  Bottom Layer w35: v1(1565.03,874.97) 1675.03,764.97 v1(1795.03,764.97)
NetR45_1: R45.1 R46.1 U8.16 | length 2572
  Top Layer w12: v1(355,3409.57) 421.77,3409.57 R45.1@460,3447.8 ; R45.1@465,3447.8 R46.1@515,3447.8 515,3348.13 858.13,3005 1549.04,3005 1566.04,2988 2597,2988 2623.43,2961.57 U8.16@2623.43,2928.66
NetR52_1: R52.1 R55.1 U8.14 | length 2404.9
  Top Layer w12: R52.1@665,3448.23 R55.1@715,3448.23 715,3175 865,3025 1555.91,3025 1573.91,3007 2630.52,3007 2674.61,2962.91 U8.14@2674.61,2928.66
NetR58_1: R58.1 R59.1 U8.13 | length 1758.8
  Top Layer w12: R59.1@1106,3144.77 R58.1@1106,3192.23 ; R59.1@1109.77,3141 1109.77,3120.23 1185,3045 1563.13,3045 1582.13,3026 2638.39,3026 2700.2,2964.19 U8.13@2700.2,2928.66
NetR62_1: R62.1 R63.1 U8.12 | length 1383.2
  Top Layer w12: R62.1@1509.77,3189.46 R63.1@1509.77,3142 1509.77,3125.23 1590,3045 2646.26,3045 2725.8,2965.46 U8.12@2725.8,2928.66
NetR66_1: R66.1 R67.1 U8.11 | length 1121.2
  Top Layer w12: v1(1910.77,3100.77) R67.1@1910.77,3142 R66.1@1910.77,3188.46 ; v1(2405,3075) 2407.15,3072.85 2427.85,3072.85 2435.71,3065 2653.13,3065 2751.39,2966.74 U8.11@2751.39,2928.66
  Bottom Layer w12: v1@1905,3095 1905,3070 1965,3010 2385,3010 2405,3030 v1(2405,3075) ; v1@1910,3100 v1(1910.77,3100.77)
NetR70_1: R70.1 R71.1 U8.10 | length 577.8
  Top Layer w12: R71.1@2345.49,3097.58 R70.1@2345.49,3149.04 ; R71.1@2346.77,3105 2422.58,3105 2442.58,3085 2660,3085 2776.98,2968.02 U8.10@2776.98,2928.66
NRST: U3.69
OVREF: D1.2 D3_TR1.2 D3_TR2.2 D3_TR3.2 D3_TR4.2 R1.1 TP2.1 | length 1569.3
  Top Layer w12: R1.1@2785,2261.77 2785,2210 2810,2185 2810,2125 2830,2105 D3_TR2.2@2846.38,2105 2906.88,2044.5 3017.93,2044.5 ; D3_TR1.2@3121.38,2104.53 3077.95,2104.53 3017.93,2044.5 ; v2(3479.53,2100.47) 3480,2100 3515,2100 3520.47,2105.47 D3_TR4.2@3548.9,2105.47 ; D3_TR3.2@3828.9,2105.47 3785.47,2105.47 3724.5,2044.5 v2(3358.2,2044.5) 3017.93,2044.5
  Bottom Layer w12: v2(3358.2,2044.5) TP2.1@3414.17,2100.47 v2(3479.53,2100.47)
R_N: DA4.1 J?.2@294,2424.15 R18.2 | length 368.4
  Top Layer w8: J?.2@294,2424.15 365,2495.15 365,2510.84 433.66,2579.5 435.58,2579.5 DA4.1@443.48,2587.4 534.39,2587.4 546.8,2575 R18.2@580.47,2575
R_P: DA4.2 J?.3@215,2424.15 R20.2 | length 443.8
  Top Layer w8: J?.3@215,2424.15 259.15,2380 310.88,2380 DA4.2@443.48,2512.6 533.48,2512.6 545.88,2525 R20.2@580.47,2525
REF1: R31_M1.2 TP33_M1.1 U3.139 | length 3459.7
  Top Layer w8: R31_M1.2@738.74,748.27 778.27,748.27 v4(778.74,748.74) ; U3.139@2300.35,2377.17 2352.83,2377.17 v2(2365,2365) ; v4@2325,1355 2380,1410 2380,1530.39 2379.47,1530.92 2379.47,1560.53 v4(2355,1585)
  Bottom Layer w8: v4(778.74,748.74) 778.74,1196.26 937.48,1355 2246.77,1355 2265.27,1373.5 2291.5,1373.5 2305,1360 v4(2330,1360) ; v4(2355,1585) 2373.5,1603.5 2373.5,1628.5 2455,1710 2455,2005 2558.5,2108.5 2558.5,2281.5 2505,2335 2420,2335 2390,2365 v2(2365,2365)
REF2: R31_M2.2 TP33_M2.1 U3.102 | length 1569.5
  Top Layer w8: R31_M2.2@1433.74,748.27 1473.27,748.27 v4(1473.74,748.74) ; v7(1940,1310) 2040,1310 2110,1380 2110,1468.79 2100,1478.79 2100,1650 2111.38,1661.38 U3.102@2111.38,1715.75
  Bottom Layer w8: v4(1473.74,748.74) 1473.74,1196.26 ; 1473.78,1196.26 TP33_M2.1@1506.26,1228.74 1617.52,1340 1910,1340 v7(1940,1310)
REF3: R31_M3.2 TP33_M3.1 U3.136 | length 2427.7
  Top Layer w8: U3.136@2300.35,2318.11 2413.11,2318.11 2455,2360 v2(2475,2360) ; v4(2490,1390) 2508.5,1408.5 2577.29,1408.5 2613.5,1444.71 2613.5,1541.5 v4(2590,1565) ; R31_M3.2@2823.74,748.27 2863.27,748.27 v4(2863.74,748.74)
  Bottom Layer w8: v2(2475,2360) 2501.21,2360 2573.5,2287.71 2573.5,2102.29 2470,1998.79 2470,1694.45 2461.5,1685.95 2461.5,1654.05 2509.05,1606.5 2548.5,1606.5 v4(2590,1565) ; v4(2490,1390) 2550,1330 2805,1330 2863.74,1271.26 v4(2863.74,748.74)
REF4: R31_M4.2 TP33_M4.1 U3.137 | length 3058.8
  Top Layer w8: U3.137@2300.35,2337.8 2407.8,2337.8 2453.5,2383.5 2511.5,2383.5 v2(2535,2360) ; v4(2535,1385) 2575,1385 2628.5,1438.5 2628.5,1571.75 v4(2612.63,1587.63) ; R31_M4.2@3518.74,748.27 3558.27,748.27 v4(3558.74,748.74)
  Bottom Layer w8: v4(2535,1385) 2575,1345 3410,1345 TP33_M4.1@3526.26,1228.74 3558.74,1196.26 v4(3558.74,748.74) ; v2(2535,2360) 2535,2347.43 2588.5,2293.93 2588.5,2096.07 2485,1992.57 2485,1688.23 2476.5,1679.73 2476.5,1660.27 2515.27,1621.5 2578.75,1621.5 v4(2612.63,1587.63)
REF_EXP1: P6.13 U3.20 | length 1643.5
  Top Layer w8: P6.13@800,1815 P6.13@820,1815 870,1865 870,1940 885.53,1955.53 1114.47,1955.53 1165,1905 v2(1220,1905) ; v2(1845,2255) 1845,2280 1855.47,2290.47 U3.20@1855.47,2546.46
  Bottom Layer w8: v2(1220,1905) 1236.21,1905 1326.21,1995 1428.79,1995 1465,2031.21 1465,2090.41 1533.09,2158.5 1748.5,2158.5 v2(1845,2255)
REF_EXP2: P6.14 U3.21 | length 1530.1
  Top Layer w8: P6.14@800,1915 P6.14@820,1915 875.53,1970.53 1133.47,1970.53 v2(1175,1929) ; v2(1825,2305) 1835.79,2315.79 U3.21@1835.79,2546.46
  Bottom Layer w8: v2(1175,1929) 1239,1929 1320,2010 1422.57,2010 1450,2037.43 1450,2096.62 1526.88,2173.5 1742.29,2173.5 1821.5,2252.71 1821.5,2301.5 v2(1825,2305)
REF_Z: R37.2 TP15.1 U3.144 | length 2487.1
  Top Layer w8: R37.2@2128.77,748.24 2168.3,748.24 v4(2168.77,748.71) ; U3.144@2300.35,2475.59 2364.41,2475.59 v2(2375,2465) ; v4(2305,1332.48) 2418.79,1332.48 2446.31,1360 2571.21,1360 2643.5,1432.29 2643.5,1589.99 2635,1598.49 v2(2635,1615)
  Bottom Layer w8: v4(2168.77,748.71) 2168.77,1196.23 ; 2168.78,1196.26 TP15.1@2201.26,1228.74 v4(2305,1332.48) ; v2(2375,2465) 2390,2450 2563.09,2450 2665,2348.09 2665,2163.23 2698.5,2129.73 2698.5,2077.29 2575,1953.79 2575,1736.77 2635.61,1676.16 v2@2635.61,1615
RESET: C63.2 J?.10 R21.1 S1.1 U3.47 | length 2437.3
  Top Layer w8: S1.1@96,3224 135,3185 235,3185 260,3210 629.09,3210 851.09,2988 1542,2988 1635,2895 1635,2812.11 1665,2782.11 J?.10@1665,2745.08 1665,2685 v2(1620,2640) ; U3.47@1469.65,2278.74 1523.74,2278.74 1551.19,2306.19 v2(1551.19,2321.6)
  Bottom Layer w8: v2(1551.19,2321.6) 1580,2350.41 1580,2472.2 1620,2512.2 v2(1620,2640)
RXD0: P5.8 U3.3 | length 2382.1
  Top Layer w8: P5.8@500,1540 575,1615 1147.57,1615 1215,1682.43 1215,1710 v2(1230,1725) ; v2(2142.43,2375) 2142.43,2422.43 2190.12,2470.12 U3.3@2190.12,2546.46
  Bottom Layer w8: v2(1230,1725) 1245,1740 1262.02,1740 1287.02,1715 1436.21,1715 1510,1788.79 1510,2071.77 1551.73,2113.5 1880.93,2113.5 v2(2142.43,2375)
RXD1: P3.2 U3.18 | length 432.3
  Top Layer w8: U3.18@1894.84,2546.46 1894.84,2738.94 1891.5,2742.29 1891.5,2781.5 P3.2@2030,2920
SCLK: P3.7 P5.3 TP6.1 U3.110 U9.6 | length 4552.8
  Top Layer w8: P5.3@300,1440 P5.3@320,1440 370,1490 370,1585 445,1660 1100,1660 1131.21,1691.21 v2(1160,1691.21) ; U9.6@2216.3,1335 2195,1335 2170,1360 2170,1465 v2(2195,1490) 2196.21,1490 2280,1573.79 v2(2280,1685) 2246.39,1718.61 2246.39,1791.39 2261.3,1806.3 U3.110@2300.35,1806.3 ; v2(2350,1645) 2375,1645 2395,1625 2540,1625 v2(2560,1645)
  Bottom Layer w8: v2(1160,1691.21) 1181.21,1670 1600.55,1670 1614.05,1683.5 1669.07,1683.5 1867.57,1485 2190,1485 v2(2195,1490) ; v2(2280,1685) 2310,1685 v2(2350,1645) ; P3.7@2330,2820 2330,2785 2315,2770 2315,2468.79 2363.79,2420 2550.66,2420 2633.5,2337.16 2633.5,2077.43 2530,1973.93 2530,1715.81 2560,1685.81 v2(2560,1645)
SHDN: U3.50
SPIFLASH_CS: U9.1
STATUS_A: R27.1 U3.142 | length 223.2
  Top Layer w8: U3.142@2300.35,2436.22 2349.33,2436.22 2360.55,2425 2420,2425 2470,2475 R27.1@2470,2503.23
STATUS_B: R28.1 U3.143 | length 167.7
  Top Layer w8: U3.143@2300.35,2455.91 2350.86,2455.91 2366.77,2440 2390,2440 2410,2460 R28.1@2410,2503.23
STEP1: TP40_M1.1 U3.85 U7_M1.22 | length 1811
  Top Layer w8: U7_M1.22@437.2,1052.2 v2(437.2,1112.64) ; v2(441.26,1283.74) 441.26,1288.69 457.57,1305 943.64,1305 1068.64,1430 1607.28,1430 1761.5,1584.22 1761.5,1657.16 1776.73,1672.39 U3.85@1776.73,1715.75
  Bottom Layer w8: v2@437,1112.84 v2(437.2,1112.64) 437.2,1181.75 TP40_M1.1@441.23,1185.77 v2@441.23,1275.77
STEP2: TP40_M2.1 U3.134 U7_M2.22 | length 2052.2
  Top Layer w8: U7_M2.22@1132.2,1052.2 v2(1132.2,1112.64) ; v2(1136.26,1278.74) 1197.52,1340 1645,1340 1890,1585 v2(1890,1600) ; v2(1960,1865) 1983.5,1888.5 1983.5,1909.73 1975,1918.23 1975,2066.36 2187.38,2278.74 U3.134@2300.35,2278.74
  Bottom Layer w8: v2@1132,1112.84 v2(1132.2,1112.64) 1132.2,1181.75 TP40_M2.1@1136.23,1185.77 v2@1136.23,1275.77 ; v2(1890,1600) 1890,1810.55 1944.45,1865 v2(1960,1865)
STEP3: TP40_M3.1 U3.114 U7_M3.22 | length 1265.3
  Top Layer w8: U3.114@2301.42,1886.1 U3.114@2300.35,1885.04 2419.41,1885.04 2494.45,1810 2650.29,1810 2703.5,1756.79 2703.5,1407.43 2596.07,1300 2552.52,1300 v4(2526.26,1273.74) ; U7_M3.22@2522.2,1052.2 v4(2522.2,1112.64)
  Bottom Layer w8: v4@2522,1112.84 v4(2522.2,1112.64) 2522.2,1181.75 TP40_M3.1@2526.23,1185.77 v4@2526.23,1275.77
STEP4: TP40_M4.1 U3.121 U7_M4.22 | length 1685
  Top Layer w8: U3.121@2300.35,2022.83 2300.69,2022.5 2409.23,2022.5 2531.73,1900 2687.57,1900 2795,1792.57 2795,1417.57 2872.57,1340 3173.23,1340 3221.23,1292.01 v4(3221.23,1275.77) ; U7_M4.22@3217.2,1052.2 v4(3217.2,1112.64)
  Bottom Layer w8: v4@3217,1112.84 v4(3217.2,1112.64) 3217.2,1181.75 TP40_M4.1@3221.23,1185.77 v4(3221.23,1275.77)
STEP_EXP1: P6.7 U3.68 | length 1056.8
  Top Layer w8: P6.7@500,1815 580,1735 1058.13,1735 1164.11,1840.98 1360.98,1840.98 1385.35,1865.35 U3.68@1469.65,1865.35
STEP_EXP2: P6.8 U3.13 | length 1836.2
  Top Layer w8: v2(1948.23,2405) 1993.27,2450.03 U3.13@1993.27,2546.46
  Bottom Layer w8: P6.8@500,1915 500,1957.57 592.43,2050 996.77,2050 1061.77,2115 1297.28,2115 1387.28,2205 1653.64,2205 1825.14,2376.5 1919.73,2376.5 v2(1948.23,2405)